# Altium PCB STM32.PcbDoc
Units mm, origin at the board's own origin, x right, y up, seen from the top; angles counter-clockwise.
Board outline 45 x 45 mm, 4 copper layers (Top Layer, Second layer, Third Layer, Bottom Layer), stack 0.602 mm thick; 38 components, 25 nets, 188 pads, 53 vias.
Unrouted connection lines stored in the file: 50.
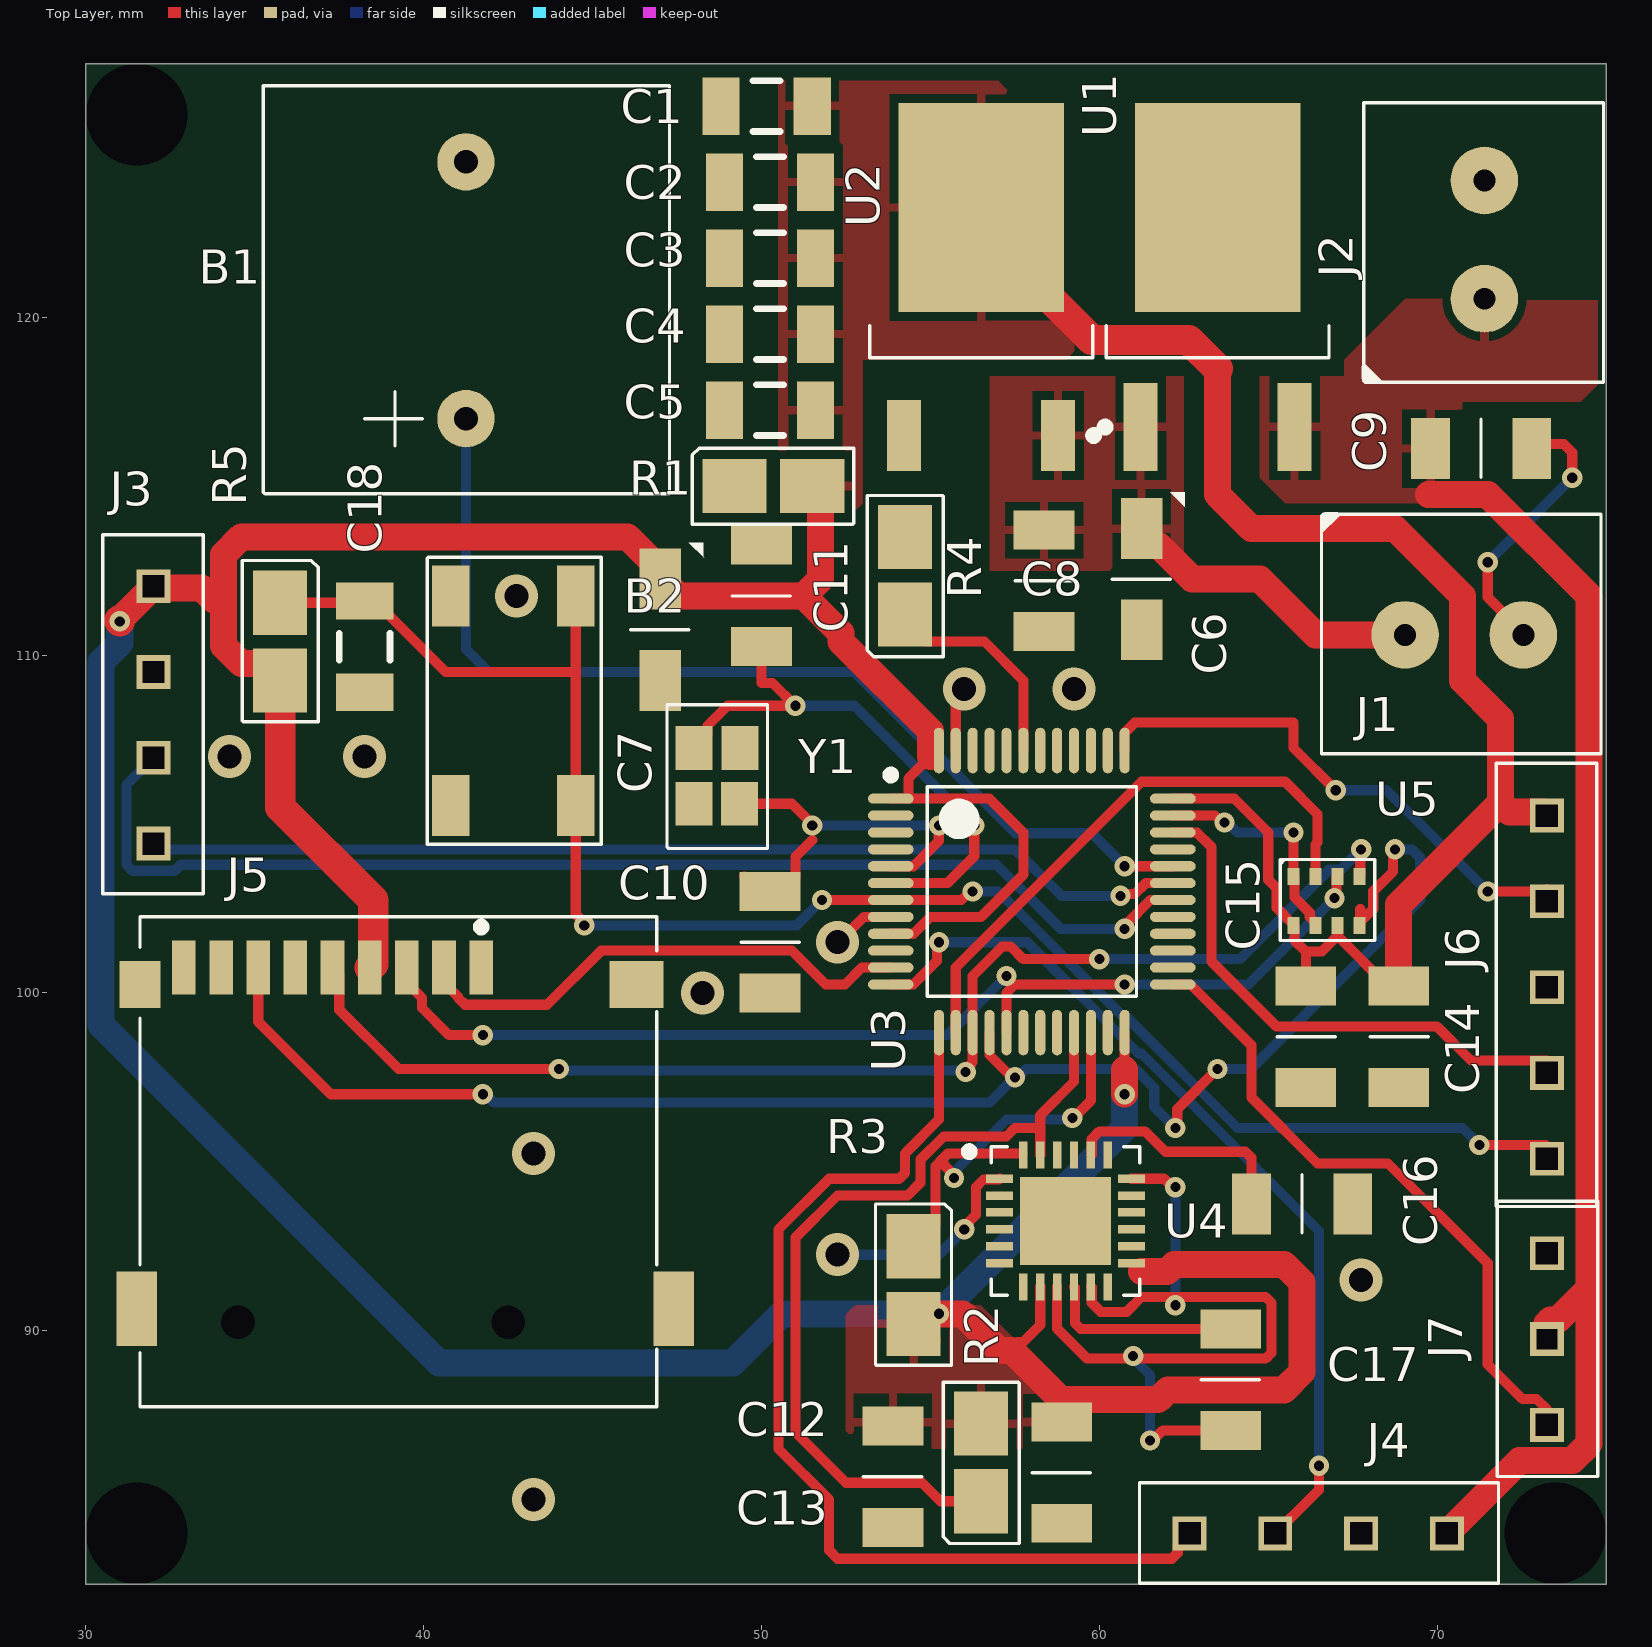
[diagram p0: Top Layer view]
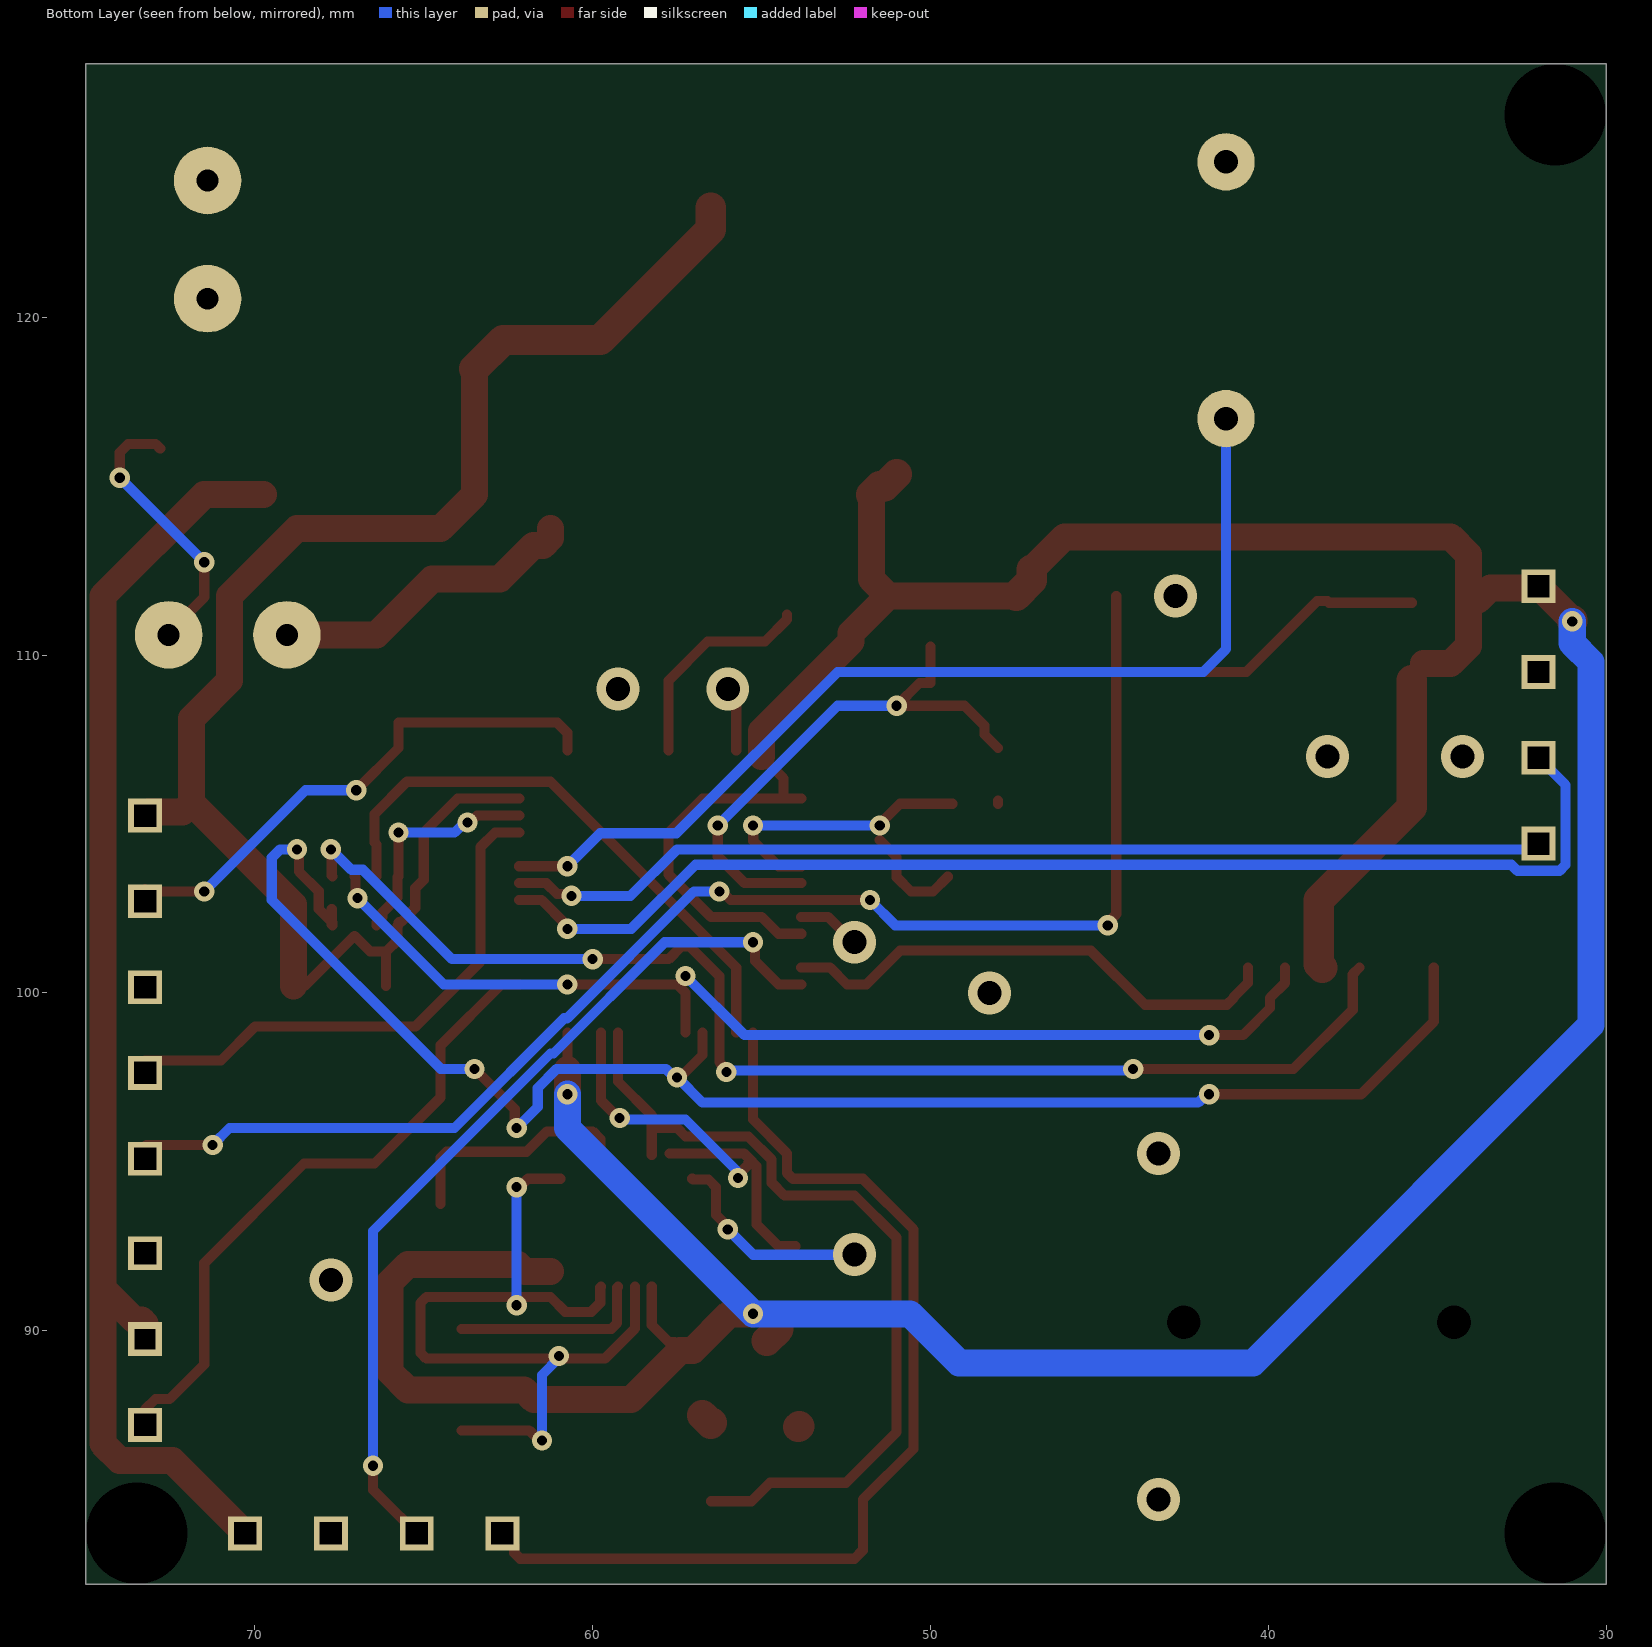
[diagram p1: Bottom Layer view, seen from below]
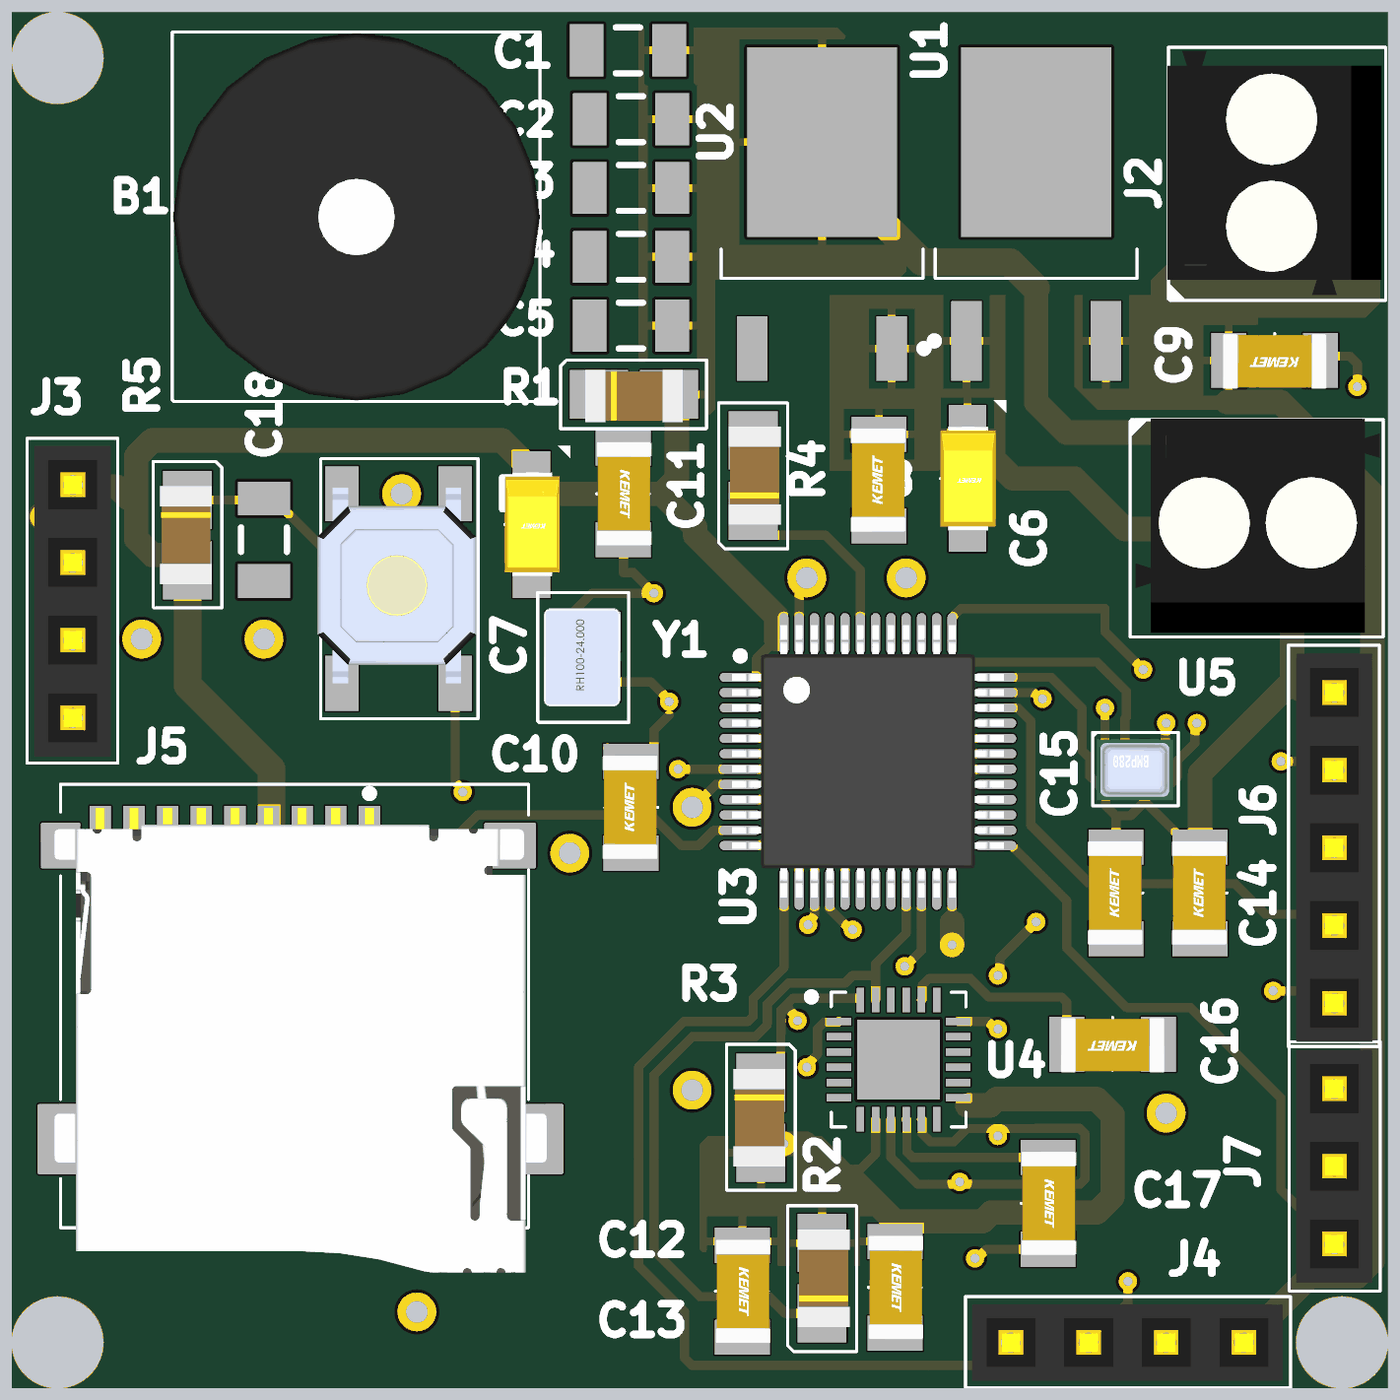
[diagram p2: 3D render of the assembled board from above, using the file's embedded part models]

## Layer stack, top to bottom
Top Solder: solder mask 0.0102, Solder Resist, Dk 3.5
Top Layer: signal copper 0.035
Dielectric 2: prepreg 0.0711, PP-006, Dk 4.1
Second layer: signal copper 0.035
Dielectric 1: dielectric 0.32, FR-4, Dk 4.8
Third Layer: signal copper 0.035
Dielectric 3: prepreg 0.0711, PP-006, Dk 4.1
Bottom Layer: signal copper 0.035
Bottom Solder: solder mask 0.0102, Solder Resist, Dk 3.5

## Board outline
30,82.5 75,82.5 75,127.5 30,127.5

## Design rules (kind name [scope] priority, off if disabled: settings)
Clearance [All] p1: gap=0.254 ignorepadtopadclearanceinfootprint=FALSE except(0.1: THPad-Via; 0.152: Arc-Track Arc-SMDPad Arc-THPad Arc-Poly Track-Track Track-SMDPad Track-THPad Track-Poly SMDPad-SMDPad SMDPad-THPad SMDPad-Poly THPad-THPad THPad-Poly Via-Poly Fill-Poly Poly-Poly)
HoleSize [All] p1: absolutevalues=TRUE maxlimit=3.1 minlimit=0.025 maxpercent=80.000 minpercent=20.000
HoleToHoleClearance [All] p1 off: gap=0.254 allowstackedmicrovias=TRUE
MinimumSolderMaskSliver [All] p1 off: minsoldermaskwidth=0.1
PolygonConnect [All] p1: connectstyle=Relief reliefconductorwidth=0.254 reliefentries=4 polygonreliefangle="90 Angle" airgapwidth=0.254
RoutingVias [All] p1: holewidth=0.3 width=0.6 viastyle="Through Hole" minholewidth=0 minwidth=0.2 maxholewidth=0.9 maxwidth=1.27
SilkToSilkClearance [All] p1 off: silktosilkclearance=0.254
SilkToSolderMaskClearance [All] p1 off: minsilkscreentomaskgap=0.01 clearancetoexposedcopper=TRUE
SolderMaskExpansion [All] p1: expansion=0.102 istentingtop=FALSE
Width [All] p1: maxlimit=1 minlimit=0.254 preferedwidth=0.3 midlayer1_prefwidth=0.254 midlayer2_prefwidth=0.254 minimp=50.000000 maximp=50.000000 favimp=50.000000
25 further rules are at their usual default settings.

## Components (designator, comment, footprint, x,y, rotation, side; value= is the part's Value field where it differs from the comment)
B1 "Buzzer 5V" "Buzzer 5V" 41.25,117 r90 top
B2 "Push Button" "PUSB BUTTON-SMD" 44.5,111.75 r270 top
C1 "0.1uF C1206" C1206 50.15,126.25 r180 top
C2 "0.1uF C1206" C1206 50.25,124 r180 top
C3 "0.1uF C1206" C1206 50.25,121.75 r180 top
C4 "0.1uF C1206" C1206 50.25,119.5 r180 top
C5 "0.1uF C1206" C1206 50.25,117.25 r180 top
C6 "10uF C1206 Tantal" "C1206 TANTAL 10uF Capacitor" 61.25,115.7 r270 top
C7 "10uF C1206 Tantal" "C1206 TANTAL 10uF Capacitor" 47,114.2 r270 top
C8 "330nF C1206" "C1206 330nF" 58.25,112.25 r90 top
C9 "330nF C1206" "C1206 330nF" 71.25,116 r180 top
C10 "16pF" "C1206 Capacitor" 52.575,95.8 r90 top
C11 "16pF" "C1206 Capacitor" 47.675,117.45 r270 top
C12 "0.1uF C1206" "C1206 330nF" 54.001,85.624 r270 top
C13 "0.1uF C1206" "C1206 330nF" 59,85.75 r270 top
C14 "0.1uF C1206" "C1206 330nF" 68.75,98.75 r90 top
C15 "0.1uF C1206" "C1206 330nF" 66,98.75 r90 top
C16 "2.2nF C1206" "C1206 Capacitor" 71.7,96.075 r180 top
C17 "0.1uF C1206" "C1206 330nF" 64,88.5 r270 top
C18 "0.1uF C1206" C1206 38.25,110.25 r270 top
J1 "1x2 3.5mm Terminal Blcok" "1x2 3.5mm Terminal Block" 70.75,110.75 r0 top
J2 "1x2 3.5mm Terminal Blcok" "1x2 3.5mm Terminal Block" 71.25,122.25 r90 top
J3 "Header 2.54mm 1x4" "HEADER 2.54MM 1X4" 32.025,112.04 r270 top
J4 "Header 2.54mm 1x4" "HEADER 2.54MM 1X4" 70.29,83.975 r180 top
J5 "Micro SD Card Holder" KLS1-TF-003 46.3,100.25 r0 top
J6 "Header 2.54mm 1x5" "HEADER 2.54MM 1X5" 67.425,104.05 r270 top
J7 "Header 2.54mm 1x3" "HEADER 2.54mm 1x3" 73.25,87.21 r90 top
R1 "10K R1206" "R1206 Resistor" 49.2,115 r0 top
R2 "4.7K R1206" "R1206 Resistor" 56.5,84.95 r90 top
R3 "4.7K R1206" "R1206 Resistor" 54.5,92.5 r270 top
R4 "10K R1206" "R1206 Resistor" 54.25,111.2 r90 top
R5 "10K R1206" "R1206 Resistor" 35.75,111.55 r270 top
U1 "L7805-DPAK" L7805-DPAK 63.5,120.9 r90 top
U2 "LD1086V33-SMD" "LD108633 3.3V SMD DPAK" 56.5,120.9 r90 top
U3 "STM32F101" LQFP48-STM 58,103 r0 top
U4 "MPU6050-SMD" "MPU6050 QFN" 59,93.25 r0 top
U5 "BMP280" BMP280 66.75,102.75 r0 top
Y1 "12pF Crystal Osc" "12pF Crystal Osc." 49.85,105.6 r90 top

## Footprints (in the part's own frame and the unit in brackets; to place one, negate y for a bottom-side part, rotate by r counter-clockwise, add the part's x,y. Pads: shape width x height; smd on the part's side, far side on the other; paste and mask are expansions set on the pad)
"1x2 3.5mm Terminal Block" [mm]
  round 2 hole 0.65: 1(-1.7,-0.15) 2(1.8,-0.15)
  silkscreen extent -4.21,-3.68 4.1,3.48, body extent -4,-3.55 3.99,3.45, height 8.9
"12pF Crystal Osc." [mm] "12pF Crystal Osc RH100 Crystal Osc"
  rect 1.3x1.1 smd mask+0.05: 1(0,0.5) 2(1.647,0.487) 3(1.65,1.85) 4(0,1.85)
  silkscreen extent -1.33,-0.33 2.93,2.65, body extent -0.8,-0.05 2.4,2.45, height 0.77
BMP280 [mm] "BMP 280 Digital pressure sensor"
  rect 0.35x0.5 smd mask+0.05: 1(-1,0.7) 1(-1,0.7) 1(-1,0.7) 1(-1,0.7) 2(-0.35,0.7) 2(-0.35,0.7) 3(0.3,0.7) 3(0.3,0.7) 4(0.95,0.7) 4(0.95,0.7) 5(0.95,-0.75) 6(0.3,-0.75) 7(-0.35,-0.75) 8(-1,-0.75)
  silkscreen extent -1.4,-1.2 1.4,1.2, body extent -1.28,-1.03 1.22,0.97, height 1
"Buzzer 5V" [mm]
  round 1.7 hole 0.7: 1(0,0) 2(7.6,0)
  silkscreen extent -2.22,-6.02 9.85,6, body extent -2.2,-6.03 9.8,5.97, height 9
C1206 [mm] "Chip Capacitor, Body 3.2x1.6mm, IPC High Density"
  rect 1.1x1.7 smd: 1(-1.35,0) 2(1.35,0)
  silkscreen extent -0.4,-0.75 0.4,0.75, body extent -1.7,-0.9 1.7,0.9, height 1.3
"C1206 330nF" [mm] "C1206 330nF Capacitor C1206 Family"
  rect 1.15x1.8 smd paste+0 mask+0.05: 1(-1.55,-0.113)
  rect 1.15x1.8 smd mask+0.05: 2(1.45,-0.113)
  silkscreen extent -0.05,-0.99 -0.05,0.74, body extent -1.75,-0.99 1.65,0.81, height 0.88
"C1206 Capacitor" [mm] "1206 Capacitor Footprint"
  rect 1.15x1.8 smd paste+0 mask+0.05: 1(4.2,2.325)
  rect 1.15x1.8 smd mask+0.05: 2(7.2,2.325)
  silkscreen extent 5.7,1.45 5.7,3.18, body extent 4,1.45 7.4,3.25, height 0.88
"C1206 TANTAL 10uF Capacitor" [mm]
  rect 1.8x1.23 smd paste+0 mask+0.05: 1(1.95,0) 2(4.95,0)
  silkscreen extent 0.87,-0.87 3.45,1.3, body extent 1.75,-0.87 5.15,0.92, height 1.81
"HEADER 2.54mm 1x3" [mm] "HEADER 2.54mm aralıklı 3 delikli header"
  rect 1x1 hole 0.65 square paste+0 mask+0.05: 1(0,0)
  rect 1x1 hole 0.6 square mask+0.05: 2(2.54,0)
  rect 1x1 hole 0.65 square mask+0.05: 3(5.08,0)
  silkscreen extent -1.53,-1.5 6.63,1.48, body extent -1.26,-1.25 6.36,1.25, height 8.4
"HEADER 2.54MM 1X4" [mm]
  rect 1x1 hole 0.65 square paste+0 mask+0.05: 1(0,-0.025) 2(2.54,-0.025) 3(5.08,-0.025) 4(7.62,-0.025)
  silkscreen extent -1.53,-1.52 9.1,1.45, body extent -1.28,-1.28 8.88,1.22, height 9.4
"HEADER 2.54MM 1X5" [mm]
  rect 1x1 hole 0.65 square paste+0 mask+0.05: 1(-1.2,5.825) 1(-1.2,5.825) 2(1.34,5.825) 3(3.88,5.825) 4(6.42,5.825) 5(8.96,5.825)
  silkscreen extent -2.75,4.33 10.38,7.3, body extent -2.47,4.57 10.23,7.07, height 9.4
KLS1-TF-003 [mm] "MICRO SD CARD HOLDER"
  rect 0.7x1.6 smd paste+0 mask+0.05: 1(-4.6,0.5) 2(-5.7,0.5) 3(-6.8,0.5) 4(-7.9,0.5) 5(-9,0.5) 6(-10.1,0.5) 7(-11.2,0.5) 8(-12.3,0.5) 9(-13.4,0.5)
  rect 1.2x1.4 smd paste+0.05: 10(-14.7,0)
  rect 1.6x1.4 smd paste+0.05: 11(0,0)
  rect 1.2x2.2 smd paste+0.05: 12(1.1,-9.6) 13(-14.8,-9.6)
  round 0 hole 1 paste-1000 mask+0: ""(-11.8,-10)
  round 0 hole 1 paste-1000: ""(-3.8,-10)
  silkscreen extent -14.7,-12.5 0.6,2, body extent -16.9,-13.35 3.1,-6.6, height 5.8
L7805-DPAK [mm] "D-PAK, 3-Pads, Body 6,20x6,66mm (max), IPC Medium Density"
  rect 2.6x1 smd mask+0.05: 1(-4.15,2.28) 2(-4.15,-2.28)
  rect 6.2x4.9 smd: 3(2.35,0)
  silkscreen extent -4.27,-3.3 -1.15,3.45, body extent -2.1,-3.3 4.1,3.3, height 2.4
"LD108633 3.3V SMD DPAK" [mm] "LD108633 3.3V SMD DPAK REGULATOR"
  rect 2.1x1 smd mask+0.05: 1(-4.4,-2.28) 2(-4.4,2.28)
  rect 6.2x4.9 smd: 3(2.35,0)
  silkscreen extent -4.52,-3.46 -1.15,3.3, body extent -2.1,-3.3 4.1,3.3, height 2.4
LQFP48-STM [mm] "TSQFP, 48-Leads, Body 7,00x7,00mm, Pitch 0,50mm, IPC Medium Density"
  oval 1.35x0.3 smd mask+0.05: 1(-4.175,2.75) 2(-4.175,2.25) 3(-4.175,1.75) 4(-4.175,1.25) 5(-4.175,0.75) 6(-4.175,0.25) 7(-4.175,-0.25) 8(-4.175,-0.75) 9(-4.175,-1.25) 10(-4.175,-1.75) 11(-4.175,-2.25) 12(-4.175,-2.75)
  oval 0.3x1.35 smd mask+0.05: 13(-2.75,-4.175) 14(-2.25,-4.175) 15(-1.75,-4.175) 16(-1.25,-4.175) 17(-0.75,-4.175) 18(-0.25,-4.175) 19(0.25,-4.175) 20(0.75,-4.175) 21(1.25,-4.175) 22(1.75,-4.175) 23(2.25,-4.175) 24(2.75,-4.175) 37(2.75,4.175) 38(2.25,4.175) 39(1.75,4.175) 40(1.25,4.175) 41(0.75,4.175) 42(0.25,4.175) 43(-0.25,4.175) 44(-0.75,4.175) 45(-1.25,4.175) 46(-1.75,4.175) 47(-2.25,4.175) 48(-2.75,4.175)
  oval 1.35x0.3 smd paste+0 mask+0.05: 25(4.175,-2.75) 26(4.175,-2.25) 27(4.175,-1.75) 28(4.175,-1.25) 29(4.175,-0.75) 30(4.175,-0.25) 31(4.175,0.25) 32(4.175,0.75) 33(4.175,1.25) 34(4.175,1.75) 35(4.175,2.25) 36(4.175,2.75)
  silkscreen extent -4.3,-3.1 3.1,3.57, body extent -4.45,-4.45 4.45,4.45, height 1.6
"MPU6050 QFN" [mm] "QFN, 24-Leads, Body 4,00x4,00mm, Pitch 0,50mm, Thermal Pad 2,70x2,60mm, IPC Medium Density"
  rect 0.8x0.25 smd paste+0 mask+0.05: 1(-1.95,1.25) 2(-1.95,0.75) 3(-1.95,0.25) 4(-1.95,-0.25) 5(-1.95,-0.75) 6(-1.95,-1.25)
  rect 0.25x0.8 smd mask+0.05: 7(-1.25,-1.95) 8(-0.75,-1.95) 9(-0.25,-1.95) 10(0.25,-1.95) 11(0.75,-1.95) 12(1.25,-1.95)
  rect 0.8x0.25 smd mask+0.05: 13(1.95,-1.25) 14(1.95,-0.75) 15(1.95,-0.25) 16(1.95,0.25) 17(1.95,0.75) 18(1.95,1.25)
  rect 0.25x0.8 smd paste+0 mask+0.05: 19(1.25,1.95) 20(0.75,1.95) 21(0.25,1.95) 22(-0.25,1.95) 23(-0.75,1.95) 24(-1.25,1.95)
  rect 2.7x2.6 smd: 25(0,0)
  silkscreen extent -2.97,-2.2 2.2,2.2, body extent -2.05,-2.05 2.05,2.05, height 0.9
"PUSB BUTTON-SMD" [mm]
  rect 1.8x1.1 smd mask+0.05: 1(0,0) 2(6.2,0) 3(0,-3.7) 4(6.2,-3.7)
  silkscreen extent -1.15,-4.4 7.35,0.75, body extent -0.2,-4.5 6.2,0.7, height 1.5
"R1206 Resistor" [mm]
  rect 1.9x1.6 smd paste+0 mask+0.05: 1(0,0)
  rect 1.9x1.6 smd mask+0.05: 2(2.3,0)
  silkscreen extent -1.25,-1.12 3.52,1.12, body extent -0.45,-0.9 2.75,0.8, height 0.61

## Part data
B2: "Smd Push Button", Satın Alma Linki=https://urun.n11.com/diger/mini-pushbutton-switch-smd-P227461537?gclid=Cj0KCQjwkoDmBRCcARIsAG3xzl8Y_-jeD7HocNM6lvuZ_rVp83568XPGtNzlPwXWLph8oCRqo0yh87UaApZYEALw_wcB&gclsrc=aw.ds
C1 C2 C3 C4 C5 C12 C13 C14 C15 C17 C18: "C1206 Capacitor 0.1uF 50V"
C6 C7: library part "10uF C1206 Tantal Capacitor"
C8 C9: "330 nF C1206 Capacitor"
C10 C11: library part "16pF C1206", "16pF C1206 Capacitor"
C16: "2.2nF C1206 Capaciitor"
J1 J2: "1x2 3.5mm Klemens"
J5: "KLS1-TF-003 MICRO SD CARD"
R1 R4 R5: "10K R1206 SMD Resistor"
R2 R3: "4.7K R1206 SMD Resistor"
U1: "L7805-DPAK 5V REGULATOR SMD 3PIN"
U2: "LD1086V33-SMD REGULATOR DPAK"
U3: "STM32F101 48 PIN MICROPROSESSOR"
U4: "MPU6050-SMD 24PIN"
U5: "BMP 280 BOSCH PRESSURE SENSOR 8 PIN"

## Free pads (board coordinates)
  rect 0x0 hole 3: 22(31.5,126) 23(73.5,84) 24(31.5,84)

## Via types
v1: diameter 0.6, hole 0.3, Top Layer to Bottom Layer, 42 vias
v2: diameter 1.27, hole 0.711, Top Layer to Bottom Layer, 11 vias

## Nets (pads, with @x,y where several pads share a name; then routed paths per layer and width w, separated by ;. In a path a pad name is that pad's centre, name@x,y a point inside that pad or via, vN(x,y) a via of type N, cw(c..) or ccw(c..) an arc to the next point about the centre after c; other vN are vias at no path point)
3.3v: C1.1 C2.1 C3.1 C4.1 C5.1 C7.1 C12.1 C13.1 C14.2 C15.2 J3.1 J5.4 J6.1 R1.2 R2.2 R3.2 R5.2 U2.3 U3.1 U3.9 U3.24 U3.36 U3.48 U4.8 U4.13 U5.6 U5.8 | length 181.7
  Top Layer w0.3: U3.9 54.5,101.75 55,102.25 56.5,102.25 57.75,103.5 57.75,104.75 56.75,105.75 U3.1@54.35,105.75 ; U3.1 U3.1@54.35,105.75 ; 54.998,106.998 54.35,106.35 U3.1@54.35,105.75 ; 57.326,89.417 57.576,89.667 57.751,89.667 58.25,90.166 U4.8 ; 60.75,97.737 U3.24 ; U3.36 64,105.75 65,104.75 65,103.348 65.25,103.098 65.25,102.52 65.67,102.1 65.725,102.1 65.745,102.08 U5.8@65.745,102.005 ; U5.8@65.77,102 65.774,101.996 65.774,101.563 66.113,101.225 ; C15.2 66.113,101.225 ; C14.2 68.538,100.2 67.05,101.688 66.587,101.225 66.113,101.225
  Top Layer w0.8: v1@31,111.04 J3.1 ; J3.1@32.05,111.99 33.424,111.99 33.789,111.625 ; R5.2@35.4,109.75 34.6,109.75 34.073,110.277 34.073,112.973 34.6,113.5 46.035,113.5 C7.1@47,112.535 ; C7.1@47.465,111.75 51.25,111.75 ; R1.2@51.75,114.75 51.75,112.25 51.25,111.75 ; 54.998,106.998 54.998,107.75 52.348,110.4 52.348,110.652 51.25,111.75 ; v1(55.25,90.5) 55.954,90.5 57.037,89.417 57.409,89.417 58.867,87.959 61.742,87.959 62.033,88.25 65.473,88.25 66,88.777 66,91.435 65.473,91.962 62.212,91.962 61.998,91.748 61.252,91.748 ; v1(60.75,97) 60.75,97.737 ; 63.5,118.473 63.5,114.75 64.5,113.75 68.75,113.75 70.75,111.75 70.75,109.245 71.87,108.125 71.87,105.62 ; C14.2 68.863,102.613 71.87,105.62 ; J6.1@73.25,105.25 73.15,105.35 72.14,105.35 71.87,105.62
  Top Layer w0.9: v1(31,111) v1@31,111.04 ; J3.1 J3.1@32.05,111.99 ; R5.2 35.75,105.5 38.5,102.75 38.5,102 38.5,100.85 J5.4 ; C7.1@47,112.535 C7.1 47,112.215 C7.1@47.465,111.75 ; R1.2@51,115.35 51.35,115 R1.2 R1.2@51.75,114.75 ; C12.1 C12.1@53.914,87.149 ; R3.2 54.5,90.05 R3.2@54.85,89.7 ; R2.2@56.475,87.275 R2.2 R2.2@56.75,87.5 ; U2.3 56.5,122.6 59.773,119.327 62.646,119.327 63.5,118.473
  Bottom Layer w0.8: v1(31,111) 31,110.351 30.446,109.797 30.446,99.054 40.454,89.046 49.149,89.046 50.603,90.5 v1(55.25,90.5) 60.75,96 v1(60.75,97)
5V: C9.2 J2.1 J4.1 J7.2 U1.2 | length 38.1
  Top Layer w0.8: 69.75,114.75 71.5,114.75 74.5,111.75 74.5,91.25 ; J4.1 72.444,86.154 74,86.154 74.5,86.654 74.5,91.25 ; J7.2@73.25,90.21 73.35,90.31 73.56,90.31 74.5,91.25
7.4V: C6.1 C8.2 J1.1 U1.1 U2.1 | length 9.3
  Top Layer w0.8: C6.1 61.25,113.465 61.465,113.25 61.75,113.25 62.75,112.25 64.75,112.25 66.4,110.6 J1.1
GND: B1.2 B2.3 B2.4 C1.2 C2.2 C3.2 C4.2 C5.2 C6.2 C7.2 C8.1 C9.1 C10.1 C11.1 C12.2 C13.2 C14.1 C15.1 C16.1 C17.2 C18.2 J1.2 J2.2 J3.2 J4.2 J5.6 J5.10 J5.11 J5.12 J5.13 J6.3 J7.3 R1.1 R4.2 U1.3 U2.2 U3.8 U3.23 U3.35 U3.47 U4.1 U4.9 U4.11 U4.18 U5.1 U5.7 Y1.2 Y1.4 | length 51.2
  Top Layer w0.3: Y1.4 Y1.4@48,105.7 ; v2(52.25,101.5) 52.284,101.5 53.034,102.25 U3.8 ; U3.47 55.75,108.488 56,108.738 v2(56,109) ; v1(56,93) 56,93.081 56.348,93.429 56.348,94.25 56.573,94.475 57.025,94.475 U4.1 ; U4.9 58.75,90.062 59.639,89.173 64.923,89.173 65.099,89.349 65.099,90.824 64.923,91 63.464,91 63.459,90.996 v1@62.25,90.996 ; U4.11 59.775,91.275 59.775,90.823 60.04,90.558 60.81,90.558 61.248,90.996 v1@62.25,90.996 ; U4.18 61.919,94.5 62.169,94.25 v1(62.25,94.25) ; v1(61.5,86.75) 61.581,86.75 61.881,87.05 C17.2 ; U3.35 63.423,105.25 63.627,105.046 v1(63.708,105.046) ; v1(62.25,90.754) v1@62.25,90.996 ; v1(65.75,104.75) 65.75,103.45 65.775,103.425 65.775,102.827 66.227,102.375 66.227,102.248 66.4,102.075 U5.7 ; v1(71.5,112.75) 71.5,111.715 72.55,110.665 J1.2 ; C9.1 72.937,116.25 73.75,116.25 74,116 v1(74,115.25)
  Bottom Layer w0.3: v2(52.25,92.25) 55.25,92.25 v1(56,93) ; v1(61,89.25) 61,89.189 61.5,88.689 v1(61.5,86.75) ; v1(62.25,90.754) v1(62.25,94.25) ; v1(63.708,105.046) 63.79,105.046 64.086,104.75 v1(65.75,104.75) ; v1(71.5,112.75) v1(74,115.25)
  other v2: 43.25,85 67.75,91.5 43.25,95.25 48.25,100 34.25,107 38.25,107 59.25,109 42.75,111.75
NetB1_1: B1.1 U3.32 | length 30.4
  Top Layer w0.3: v1(60.75,103.75) U3.32
  Bottom Layer w0.3: B1.1 41.25,110.176 41.926,109.5 52.746,109.5 57.521,104.725 59.775,104.725 v1(60.75,103.75)
NetC10_2: C10.2 U3.5 Y1.1 | length 11.6
  Top Layer w0.3: Y1.1 50.9,105.6 51.5,105 v1(51.5,104.954) ; C10.2@49.487,103.438 49.925,103 C10.2 50.575,103 51,103.425 51,104.025 51.5,104.525 ; U3.5 54.5,103.75 55.247,104.497 55.247,104.951 v1(55.25,104.954)
  Bottom Layer w0.3: v1(51.5,104.954) v1(55.25,104.954)
NetC11_2: C11.2 U3.6 Y1.3 | length 16.5
  Top Layer w0.3: Y1.3 48.4,107.65 48.4,107.911 48.989,108.5 v1(51,108.5) 50.324,109.176 50,109.176 C11.2 ; U3.6 55.5,103.25 56.296,104.046 v1(56.296,104.954)
  Bottom Layer w0.3: v1(51,108.5) 52.75,108.5 v1(56.296,104.954)
NetC16_2: C16.2 U4.20 | length 7
  Top Layer w0.3: U4.20 59.775,95.225 59.775,95.677 60,95.902 61.352,95.902 61.958,95.296 64.324,95.296 64.5,95.12 C16.2
NetC17_1: C17.1 U4.10 | length 5.8
  Top Layer w0.3: U4.10 59.275,91.275 59.275,90.226 59.451,90.05 C17.1
NetJ3_3: J3.3 U3.30 | length 35.8
  Top Layer w0.3: v1(60.75,101.896) 60.807,101.953 60.807,102.047 61.511,102.75 U3.30
  Bottom Layer w0.3: J3.3 31.198,106.158 31.198,103.795 31.375,103.618 32.625,103.618 32.802,103.795 56.955,103.795 58.854,101.896 v1(60.75,101.896)
NetJ3_4: J3.4 U3.31 | length 31
  Top Layer w0.3: v1(60.627,102.873) 60.685,102.93 61.052,102.93 61.372,103.25 U3.31
  Bottom Layer w0.3: J3.4 32.17,104.25 57.5,104.25 58.877,102.873 v1(60.627,102.873)
NetJ4_3: J4.3 U3.12 | length 26.9
  Top Layer w0.3: U3.12 54.489,100.25 55.193,100.953 55.193,101.443 v1(55.25,101.5) ; J4.3@64.928,83.718 66.5,85.29 v1(66.5,86)
  Bottom Layer w0.3: v1(55.25,101.5) 57.865,101.5 61.161,98.204 61.249,98.204 66.5,92.953 v1(66.5,86)
NetJ4_4: J4.4 U3.13 | length 30.3
  Top Layer w0.3: U3.13 55.25,96.25 54.25,95.25 54.25,94.676 54.074,94.5 52,94.5 50.5,93 50.5,86.5 52,85 52,83.5 52.25,83.25 62.144,83.25 62.32,83.426 62.32,83.65 J4.4
NetJ5_2: J5.2 U3.11 | length 15.2
  Top Layer w0.3: J5.2 40.6,100.3 41.013,99.887 41.013,99.86 41.225,99.648 43.648,99.648 45.252,101.252 50.9,101.252 51.902,100.25 52.469,100.25 52.969,100.75 U3.11
NetJ5_3: J5.3 U3.17 U5.3 | length 32.5
  Top Layer w0.3: J5.3 39.5,100.3 39.948,99.852 39.948,99.552 40.75,98.75 v1(41.75,98.75) ; U3.17 57.25,100 57.5,100.25 v1(60.75,100.25) ; v1(66.962,102.804) 66.962,102.885 67.025,102.948 67.025,103.425 U5.3@67.05,103.45
  Bottom Layer w0.3: v1(41.75,98.75) 55.5,98.75 v1(57.25,100.5) ; v1(60.75,100.25) 64.408,100.25 v1(66.962,102.804)
NetJ5_5: J5.5 U3.15 U5.4 | length 37.7
  Top Layer w0.3: J5.5 37.5,100.55 37.5,99.5 39.25,97.75 v1(44,97.75) ; v1(56.041,97.659) 56.041,97.74 56.25,97.949 U3.15 56.25,100.5 57.126,101.376 57.374,101.376 57.75,101 v1(60,101) ; U5.4@67.7,103.45 67.725,103.475 67.725,104.225 v1(67.75,104.25)
  Bottom Layer w0.3: v1(44,97.75) 44.045,97.705 55.996,97.705 v1(56.041,97.659) ; v1(60,101) 64.163,101 66.807,103.644 67.144,103.644 v1(67.75,104.25)
NetJ5_7: J5.7 U3.16 U5.5 | length 48.5
  Top Layer w0.3: J5.7 35.1,99.15 37.25,97 v1(41.75,97) ; U3.16 56.75,98.161 57.353,97.557 57.443,97.557 v1(57.5,97.5) ; v1(62.25,96) 62.307,96.057 62.307,96.557 v1(63.5,97.75) ; 67.725,102.48 U5.5@67.725,102.1 ; v1(68.75,104.25) 68.693,104.193 68.693,103.591 68.11,103.008 68.11,102.485 U5.5@67.725,102.1 ; U5.5@67.725,102.1 67.725,102.025 U5.5 67.7,102.075 U5.5@67.725,102.1
  Bottom Layer w0.3: v1(41.75,97) 41.826,97 42.076,96.75 56.75,96.75 v1(57.5,97.5) 57.581,97.5 57.833,97.752 61.061,97.752 61.627,97.186 61.627,96.623 v1(62.25,96) ; v1(63.5,97.75) 64.5,97.75 69.5,102.75 69.5,104 69.25,104.25 v1(68.75,104.25)
NetJ6_2: J6.2 U3.37 | length 15.7
  Top Layer w0.3: U3.37 60.75,107.7 61.05,108 65.75,108 65.75,107.25 v1(67,106) ; v1(71.5,103) 73.17,103 J6.2@73.25,103.08
  Bottom Layer w0.3: v1(67,106) 68.5,106 v1(71.5,103)
NetJ6_4: J6.4 U3.34 | length 15.9
  Top Layer w0.3: U3.34 62.888,104.75 63.324,104.314 63.324,100.926 65.25,99 70,99 71,98 J6.4@73.25,98
NetJ7_1: J7.1 U3.25 | length 18.9
  Top Layer w0.3: U3.25 62.7,100.25 64.5,98.45 64.5,96.91 66.458,94.952 68.548,94.952 71.5,92 71.5,89 72.522,87.978 72.942,87.978 J7.1@73.25,87.67
NetR2_1: R2.1 U3.21 U4.23 | length 25.1
  Top Layer w0.3: R2.1 55.3,84.95 54.75,85.5 52.5,85.5 51,87 51,92.75 52.25,94 54.324,94 54.702,94.378 54.702,95.063 55.389,95.75 57.25,95.75 57.5,96 58.25,96 ; U4.23 58.25,96 ; U3.21 59.25,97.375 58.25,96.375 58.25,96
NetR3_1: R3.1 U3.22 U4.24 | length 13.7
  Top Layer w0.3: R3.1@54,92.5 R3.1 55.15,93.15 55.15,94.086 55.154,94.09 55.154,94.876 55.367,95.089 ; v1(55.698,94.522) 55.698,94.603 55.436,94.865 55.436,94.895 55.367,94.964 55.367,95.089 ; U4.24@57.725,95.25 55.528,95.25 55.367,95.089 ; v1(59.2,96.3) 59.239,96.3 59.75,96.811 U3.22
  Bottom Layer w0.3: v1(55.698,94.522) 55.756,94.579 55.756,94.756 57.25,96.25 59.151,96.25 v1(59.2,96.3)
NetR4_1: R4.1 U3.43 | length 6.5
  Top Layer w0.3: R4.1 54.25,111.05 54.9,110.4 56.6,110.4 57.75,109.25 U3.43
NetU3_14: U3.14 U5.2 | length 17.2
  Top Layer w0.3: U3.14 55.75,100.75 61.25,106.25 65.5,106.25 66.454,105.296 66.454,104.45 66.4,104.396 U5.2@66.4,103.45
NRST: B2.1 B2.2 C18.1 J6.5 R5.1 U3.7 | length 51.5
  Top Layer w0.3: R5.1 38.2,111.55 C18.1 38.55,111.6 40.65,109.5 44.5,109.5 ; B2.1 44.5,109.5 ; v1(44.75,102) 44.75,102.081 44.5,102.331 B2.2 44.5,109.5 ; v1(51.791,102.75) U3.7 55.919,102.75 56.169,103 v1(56.25,103) ; v1(71.25,95.5) 73.21,95.5 J6.5@73.25,95.46
  Bottom Layer w0.3: v1(44.75,102) 51.041,102 v1(51.791,102.75) ; v1(56.25,103) 57.004,103 60.754,99.25 60.842,99.25 64.092,96 70.75,96 v1(71.25,95.5)
pads on no net: J5. J5.1 J5.8 J5.9 U3.2 U3.3 U3.4 U3.10 U3.18 U3.19 U3.20 U3.26 U3.27 U3.28 U3.29 U3.33 U3.38 U3.39 U3.40 U3.41 U3.42 U3.44 U3.45 U3.46 U4.2 U4.3 U4.4 U4.5 U4.6 U4.7 U4.12 U4.14 U4.15 U4.16 U4.17 U4.19 U4.21 U4.22 U4.25

## Polygon pours and split planes (outlines as drawn)
3.3v on Top Layer "3.3V_L01_P004" (solid, pour order 4): 52.75,90.75 56.5,90.75 59,88.25 60.25,88.25 60.75,87.75 60.75,87 60,86.25 59.75,86.5 53,86.5 52.5,87 52.5,90.5
3.3v on Top Layer "3.3V_L01_P003" (solid, pour order 3): 50.5,127 57,127 59.25,124.75 59.25,119 59,118.75 53,118.75 53,114.5 52.5,114 50.5,114 50.5,126.25
5V on Top Layer "5V_L01_P002" (solid, pour order 2): 71.4,120.55 69.05,120.55 67.25,118.75 67.25,118.25 68,117.5 74.25,117.5 74.75,118 74.75,120.5 71.45,120.5
5V on Top Layer "5V_L01_P001" (solid, pour order 1): 64.75,118.25 67.25,118.25 68,117.5 70.75,117.5 70.75,115 70.25,114.5 65.5,114.5 64.75,115.25
7.4V on Top Layer "7.4V_L01_P000" (solid, pour order 0): 57.75,118.25 62.5,118.25 62.5,112.5 56.75,112.5 56.75,113.25 56.75,118.25